# EAGLE board rescue_linea5cny (EAGLE 9.1.3)
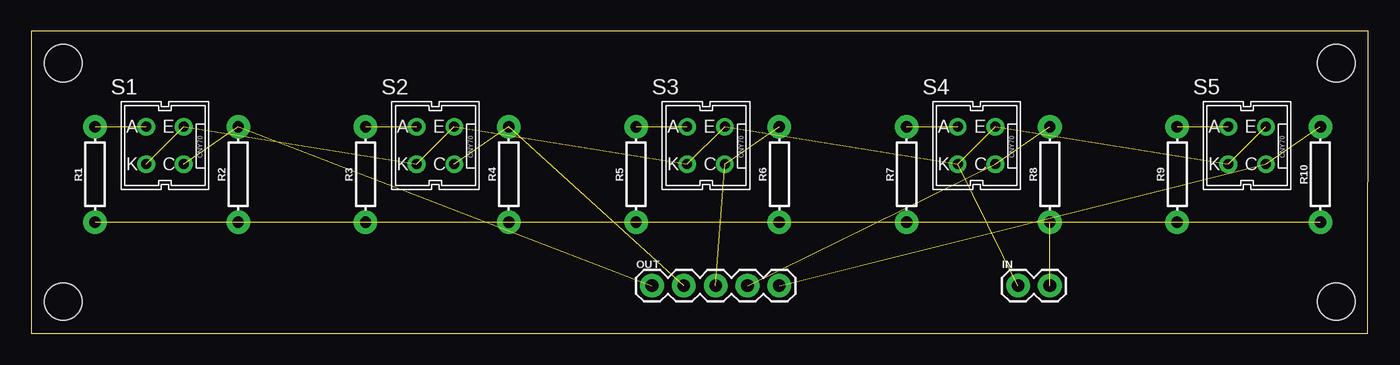
[diagram p0: board, top side]
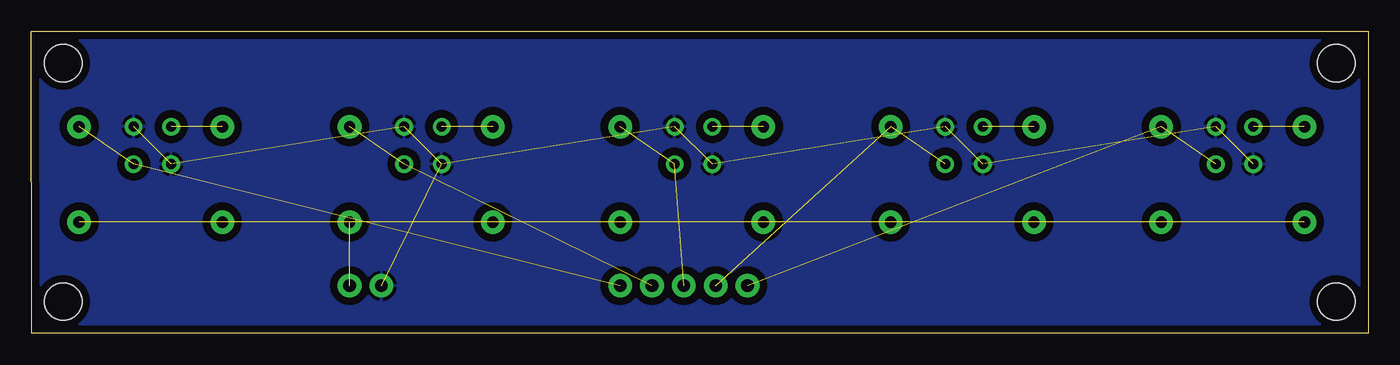
[diagram p1: board, bottom side, seen from below]

Size 106.68 x 24.13 mm. Coordinates in mm from the lower left corner, seen from the top.
Outline: 0,0 106.66,0 106.68,24.13 0,24.13 0,0
Copper layers (1*16): Top 0.035mm / dielectric 1.5mm / Bottom 0.035mm
Design rules "SparkFun": minimum track width 8mil, minimum drill 20mil, track to track 8mil, track to pad 8mil, pad to pad 8mil, via to via 8mil, smd to smd 8mil, copper to edge 10mil, drill to drill 8mil, minimum pad ring 12mil, minimum via ring 10mil, stop-mask expansion 4mil, vias tented up to drill 25mil, thermal gap 10mil
Holes 3 mm at 2.54,21.59 2.54,2.54 104.14,2.54 104.14,21.59

## Footprints (pad centres in the part's own frame; a part is rotated, then mirrored left to right if it is on the bottom)
1X02 = drill 1.016 pad 1.88: 1 0,0; 2 2.54,0
1X05 = drill 1.016 pad 1.88: 1 0,0; 2 2.54,0; 3 5.08,0; 4 7.62,0; 5 10.16,0
AXIAL-0.3 = drill 0.9 pad 1.88: P$1 -3.81,0; P$2 3.81,0
CNY70 = drill 0.8: A -1,0; C 2,-3; E 2,0; K -1,-3

## Placement (x,y rotation side)
IN  [1X02]  78.74,3.81 0 top
OUT  [1X05]  49.53,3.81 0 top
R1  220  [AXIAL-0.3]  5.08,12.7 90 top
R2  10k  [AXIAL-0.3]  16.51,12.7 90 top
R3  220  [AXIAL-0.3]  26.67,12.7 90 top
R4  10k  [AXIAL-0.3]  38.1,12.7 90 top
R5  220  [AXIAL-0.3]  48.26,12.7 90 top
R6  10k  [AXIAL-0.3]  59.69,12.7 90 top
R7  220  [AXIAL-0.3]  69.85,12.7 90 top
R8  10k  [AXIAL-0.3]  81.28,12.7 90 top
R9  220  [AXIAL-0.3]  91.44,12.7 90 top
R10  10k  [AXIAL-0.3]  102.87,12.7 90 top
S1  CNY70  [CNY70]  10.16,16.51 0 top
S2  CNY70  [CNY70]  31.75,16.51 0 top
S3  CNY70  [CNY70]  53.34,16.51 0 top
S4  CNY70  [CNY70]  74.93,16.51 0 top
S5  CNY70  [CNY70]  96.52,16.51 0 top

## Library data of the parts
IN OUT = SparkFun-Connectors
R1-R10 = SparkFun-Resistors
S1-S5 = CNY70; CNY70: CNY70

## Nets
GND: IN.1 S1.E S1.K S2.E S2.K S3.E S3.K S4.E S4.K S5.E S5.K
N$1: R3.P$2 S2.A
N$2: R1.P$2 S1.A
N$3: R5.P$2 S3.A
N$4: R7.P$2 S4.A
N$5: R9.P$2 S5.A
OUT1: OUT.1 R2.P$2 S1.C
OUT2: OUT.2 R4.P$2 S2.C
OUT3: OUT.3 R6.P$2 S3.C
OUT4: OUT.4 R8.P$2 S4.C
OUT5: OUT.5 R10.P$2 S5.C
VCC: IN.2 R1.P$1 R2.P$1 R3.P$1 R4.P$1 R5.P$1 R6.P$1 R7.P$1 R8.P$1 R9.P$1 R10.P$1

## Tracks (layer width: path | path; a pad name or v marks a point on that pad's centre or on a via)
GND  (10 unrouted)
  pour Bottom (isolate 0.61): -1.27,25.4 107.95,25.4 107.95,-1.27 -1.27,-1.27
N$1  (1 unrouted)
N$2  (1 unrouted)
N$3  (1 unrouted)
N$4  (1 unrouted)
N$5  (1 unrouted)
OUT1  (2 unrouted)
OUT2  (2 unrouted)
OUT3  (2 unrouted)
OUT4  (2 unrouted)
OUT5  (2 unrouted)
VCC  (10 unrouted)